# Altium PCB PCB_主板.pcbdoc
Units mil, origin at the board's own origin, x right, y up, seen from the top; angles counter-clockwise.
Board outline 5270 x 3720 mil, 2 copper layers (Top Layer, Bottom Layer); 67 components, 63 nets, 218 pads, 341 vias.
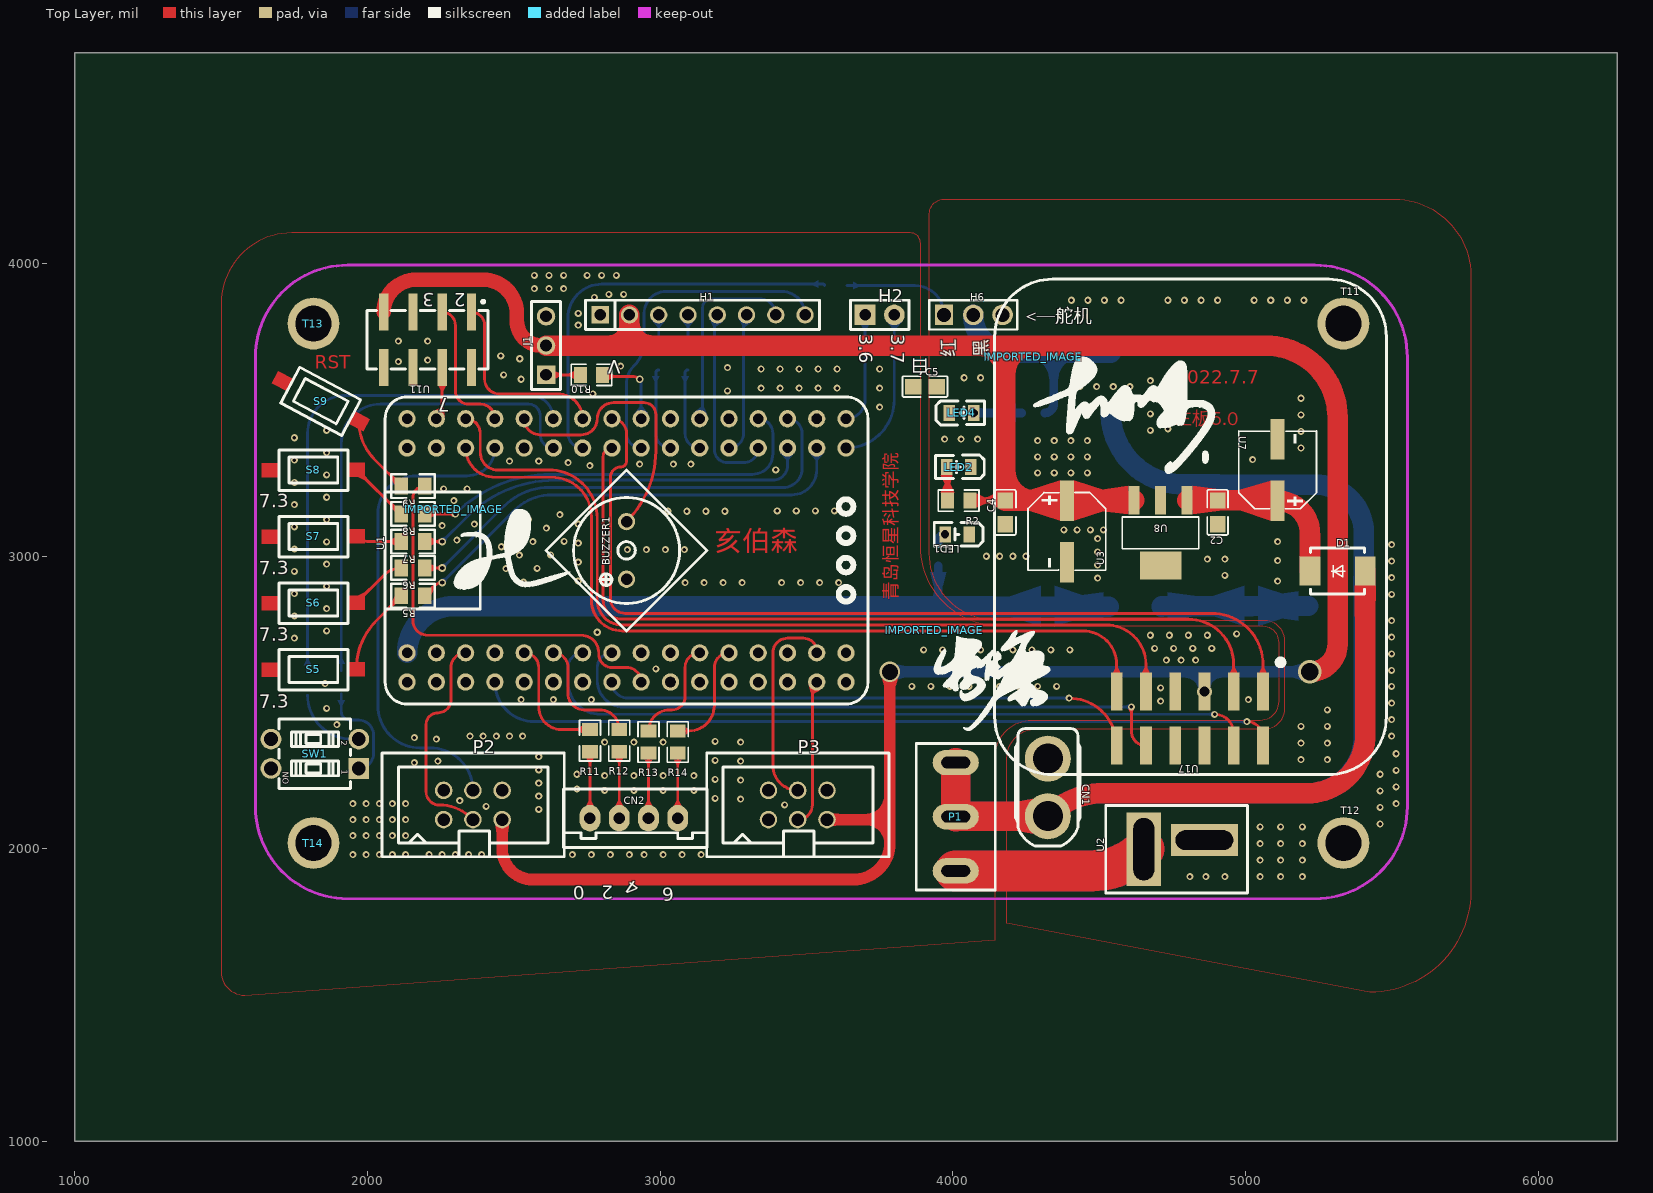
[diagram p0: Top Layer view]
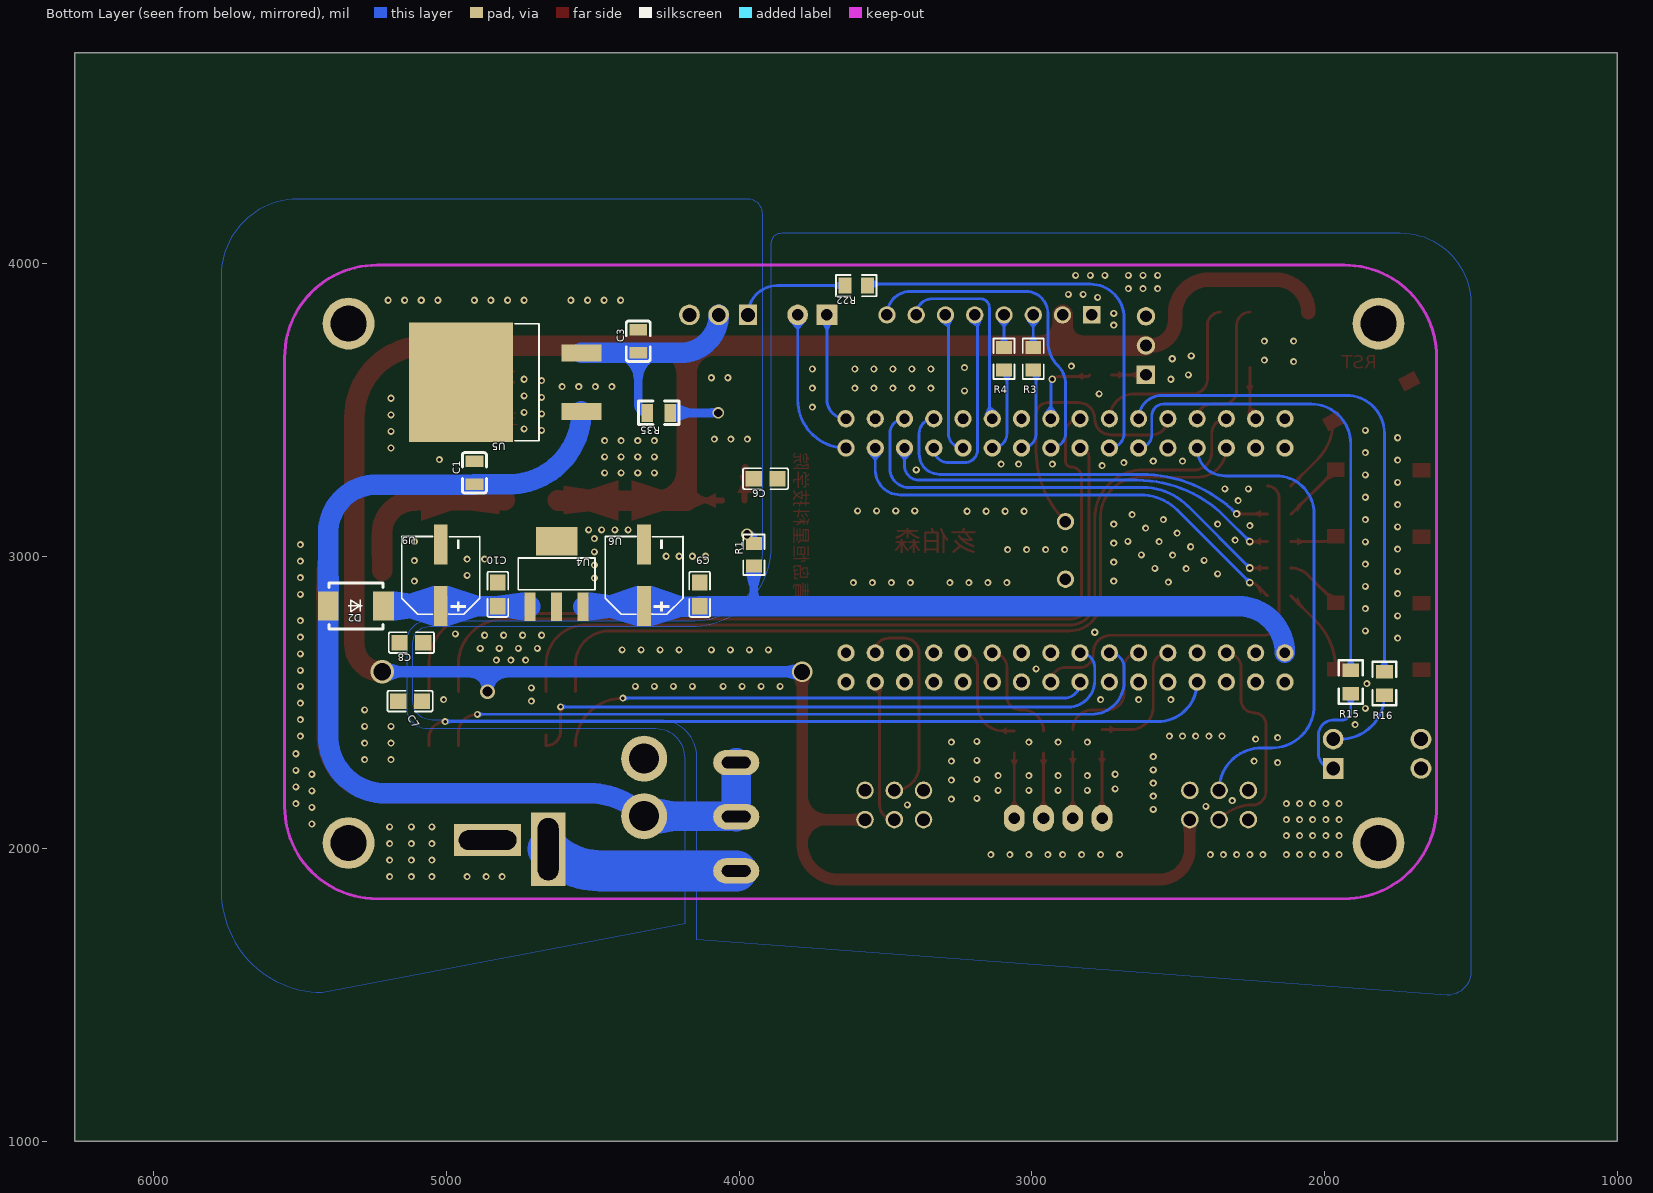
[diagram p1: Bottom Layer view, seen from below]

## Layer stack, top to bottom
Top Layer: signal copper (thickness not stored)
Dielectric: dielectric 12.6, FR-4, Dk 4.8
Bottom Layer: signal copper (thickness not stored)

## Board outline
6270,1000 1000,1000 1000,4720 6270,4720

## Components (designator, comment, footprint, x,y, rotation, side; value= is the part's Value field where it differs from the comment)
BUZZER1 "有源蜂鸣器直径9*5.5MM3V" BUZ-TH_BD9.0-P5.00-D0.6-L-FD 2885,3020 r90 top
C1 "330nF" C0805#1 4905,3285 r270 bottom
C2 "100uF" C0805#2 4905,3150 r90 top
C3 "100nF" C0805#1 4345,3735 r270 bottom
C4 "100uF" C0805#2 4180,3150 r90 top
C5 "0R" C0805#2 3905,3580 r0 top
C6 "0R" C0805#3 3910,3265 r180 bottom
C7 "0R" C0805#3 5125,2505 r180 bottom
C8 "0R" C0805#3 5120,2705 r180 bottom
C9 "100uF" C0805#3 4135,2870 r90 bottom
C10 "100uF" C0805#3 4825,2870 r90 bottom
CN1 "Changzhou" CONN-TH_XT30UPB-F 4325,2210 r270 top
CN2 "XH2.54-4A" XH2.54-4A 2910,2105 r0 top
D1 "SS54" SMB_L4.6-W3.6-LS5.3-R-RD#1 5315,2950 r0 top
D2 "SS54" SMB_L4.6-W3.6-LS5.3-R-RD#2 5310,2830 r180 bottom
H1 "排针1*8P 2.54" HDR-TH_8P-P2.54-V-M 3145,3825 r0 top
H2 "Header-Male-2.54_1x2" HDR-TH_2P-P2.54-V-M-1 3750,3825 r0 top
H6 "Z-211-0311-0021-001" HDR-TH_3P-P2.54-V-M-1 4070,3825 r0 top
IMPORTED_IMAGE "IMPORTED_IMAGE" IMPORTED_IMAGE 4274.6,3681.34 r0 top
IMPORTED_IMAGE "IMPORTED_IMAGE" IMPORTED_IMAGE 3936.54,2747.07 r0 top
IMPORTED_IMAGE "IMPORTED_IMAGE" IMPORTED_IMAGE 2294.77,3161.16 r0 top
J1 "排针 3P" "排针 3P" 2605,3720 r90 top
LED1 "E6C0805UR" LED0805-R-RD 4015,3075 r180 top
LED2 "E6C0805UR" LED0805-R-RD 4020,3305 r180 top
LED4 "E6C0805UR" LED0805-R-RD 4030,3490 r0 top
P1 "钮子开关" "钮子开关 MTS-102" 4010,2110 r90 top
P2 "HDR-IDC-2.54-2X3P" IDC-TH_6P-P2.54_C11214 2360,2150 r0 top
P3 "HDR-IDC-2.54-2X3P" IDC-TH_6P-P2.54_C11214 3470,2150 r0 top
R1 "4.7k" R0805#1 3950,3005 r270 bottom
R2 "4.7k" R0805#2 4020,3190 r180 top
R3 "100" 100R0805#1 2995,3675 r270 bottom
R4 "100" 100R0805#1 3095,3675 r270 bottom
R5 "470Ω" 0805#1 2195,2865 r180 top
R6 "470Ω" 0805#1 2195,2960 r180 top
R7 "470Ω" 0805#1 2195,3050 r180 top
R8 "470Ω" 0805#1 2195,3145 r180 top
R9 "470Ω" 0805#1 2195,3240 r180 top
R10 "100R" R0805#2 2765,3620 r180 top
R11 "100" 100R0805#2 2760,2370 r270 top
R12 "100" 100R0805#2 2860,2370 r270 top
R13 "100" 100R0805#2 2960,2365 r270 top
R14 "100" 100R0805#2 3060,2365 r270 top
R15 "470Ω" 0805#2 1910,2610 r90 bottom
R16 "470Ω" 0805#2 1795,2605 r90 bottom
R22 "1k" R0805#1 3600,3925 r180 bottom
R35 "330" R0805#3 4275,3490 r180 bottom
S5 "SW-PB" 3*6*2.5MM轻触开关 1815,2613.11 r180 top
S6 "SW-PB" 3*6*2.5MM轻触开关 1815,2840.41 r180 top
S7 "SW-PB" 3*6*2.5MM轻触开关 1815,3067.7 r180 top
S8 "SW-PB" 3*6*2.5MM轻触开关 1815,3295 r180 top
S9 "SW-PB" 3*6*2.5MM轻触开关 1840,3530 r152 top
SW1 "拨码开关2P-2.54" SW-TH_NDI-02H-V 1820,2325 r90 top
T11 "铜柱KBLADE" 螺丝孔-3MM 5335,3795 r0 top
T12 "铜柱KBLADE" 螺丝孔-3MM 5335,2020 r0 top
T13 "铜柱KBLADE" 螺丝孔-3MM 1815.01,3795 r0 top
T14 "铜柱KBLADE" 螺丝孔-3MM 1815,2020 r0 top
U1 "STC16H40K128_CoreBoard" STC16H40K128_COREBOARD 2885,3020 r90 top
U2 "T插" T插 4785,2030 r90 top
U3 "LM2940IMP-5.0" SOT-223-4_L6.5-W3.5-P2.30-LS7.0-BR#1 4710,3080 r90 top
U4 "LM2940IMP-5.0" SOT-223-4_L6.5-W3.5-P2.30-LS7.0-BR#2 4624.16,2939.69 r90 bottom
U5 "L7806" TO-263-2_L10.1-W9.1-P5.08-LS15.2-TL 4745,3595 r180 bottom
U6 "220uf16V" CAP-SMD_BD6.3-L6.6-W6.6-LS7.6-FD#1 4325,2935 r270 bottom
U7 "100uf25V" CAP-SMD_BD6.3-L6.6-W6.6-LS7.6-FD#2 5110,3295 r90 top
U8 "220uf16V" CAP-SMD_BD6.3-L6.6-W6.6-LS7.6-FD#2 4390,3085 r270 top
U9 "100uf25V" CAP-SMD_BD6.3-L6.6-W6.6-LS7.6-FD#1 5020,2935 r270 bottom
U11 "贴片排母_2X04_P2.54" HDR-SMD_8P-P2.54-V-F-R2-C4-S7.1 2205,3740 r180 top
U17 "贴片排针2*6P" 贴片排母2*6P 4810,2445 r180 top

## Footprints (in the part's own frame and the unit in brackets; to place one, negate y for a bottom-side part, rotate by r counter-clockwise, add the part's x,y. Pads: shape width x height; smd on the part's side, far side on the other; paste and mask are expansions set on the pad)
3*6*2.5MM轻触开关 [mil]
  Top Layer region: 116.91,-22.78 116.91,24.47 175.96,24.47 175.96,-22.78
  Top Layer region: -175.96,-24.47 -175.96,22.78 -116.91,22.78 -116.91,-24.47
  silkscreen extent -118,-68 118,70
100R0805#1 [mil]
  rect 44.59x54.21 smd paste-3937.01 mask+2: 1(38.04,0) 2(-38.04,0)
  silkscreen extent -69,-36 69,36
100R0805#2 [mil]
  rect 44.59x54.21 smd paste-3937.01 mask+2: 1(-38.04,0) 2(38.04,0)
  silkscreen extent -69,-36 69,36
0805#1 [mm]
  rect 1.16x1.47 smd paste+0 mask+0.051: 1(0,0) 2(2.032,0)
  silkscreen extent -0.88,-1.04 2.89,1.04
0805#2 [mm]
  rect 1.16x1.47 smd paste+0 mask+0.051: 1(0,0) 2(-2.032,0)
  silkscreen extent -2.89,-1.04 0.88,1.04
BUZ-TH_BD9.0-P5.00-D0.6-L-FD [mm]
  round 1.5 hole 1 paste+0 mask+0.051: 1(-2.5,0) 2(2.5,0)
  silkscreen extent -4.6,-4.6 4.6,4.6
C0805#1 [mm]
  rect 1x1.55 smd paste+0 mask+0.102: 1(1,0) 2(-1,0)
  silkscreen extent -1.75,-1.04 1.75,1.04
C0805#2 [mm]
  rect 1.41x1.35 smd paste-100 mask+0.051: 1(-1.03,0) 2(1.03,0)
  silkscreen extent -1.96,-0.9 1.96,0.9
C0805#3 [mm]
  rect 1.41x1.35 smd paste-100 mask+0.051: 1(1.03,0) 2(-1.03,0)
  silkscreen extent -1.96,-0.9 1.96,0.9
CAP-SMD_BD6.3-L6.6-W6.6-LS7.6-FD#1 [mm]
  rect 3.5x1.2 smd paste+0 mask+0.051: 1(2.67,0) 2(-2.67,0)
  silkscreen extent -3.38,-3.38 3.38,3.38
CAP-SMD_BD6.3-L6.6-W6.6-LS7.6-FD#2 [mm]
  rect 3.5x1.2 smd paste+0 mask+0.051: 1(-2.67,0) 2(2.67,0)
  silkscreen extent -3.38,-3.38 3.38,3.38
CONN-TH_XT30UPB-F [mm]
  round 4 hole 2.6 paste+0 mask+0.051: 1(-2.5,0) 2(2.5,0)
  silkscreen extent -5.1,-2.8 5.1,2.8
HDR-SMD_8P-P2.54-V-F-R2-C4-S7.1 [mm]
  rect 0.8x3.2 smd paste+0 mask+0.051: 1(-3.81,-2.4) 2(-3.81,2.4) 3(-1.27,-2.4) 4(-1.27,2.4) 5(1.27,-2.4) 6(1.27,2.4) 7(3.81,-2.4) 8(3.81,2.4)
  silkscreen extent -5.25,-3.43 5.25,2.54
HDR-TH_2P-P2.54-V-M-1 [mm]
  rect 1.8x1.8 hole 1 paste+0 mask+0.051: 1(-1.27,0)
  round 1.8 hole 1 paste+0 mask+0.051: 2(1.27,0)
  silkscreen extent -2.54,-1.27 2.54,1.27
HDR-TH_3P-P2.54-V-M-1 [mm]
  rect 1.575x1.8 hole 1.2 paste+0 mask+0.051: 1(-2.54,0)
  round 1.8 hole 1.2 paste+0 mask+0.051: 2(0,0) 3(2.54,0)
  silkscreen extent -3.81,-1.27 3.81,1.27
HDR-TH_8P-P2.54-V-M [mm]
  rect 1.5x1.5 hole 1 paste+0 mask+0.051: 1(-8.89,0)
  round 1.5 hole 1 paste+0 mask+0.051: 2(-6.35,0) 3(-3.81,0) 4(-1.27,0) 5(1.27,0) 6(3.81,0) 7(6.35,0) 8(8.89,0)
  silkscreen extent -10.16,-1.27 10.16,1.27
IDC-TH_6P-P2.54_C11214 [mil]
  round 60 hole 43.3 paste+0 mask+2: 1(-100,-50) 2(-100,50) 3(0,-50) 4(0,50) 5(100,-50) 6(100,50)
  silkscreen extent -311,-177 312,178
IMPORTED_IMAGE [mil]
  silkscreen extent 0,-400 622,0
LED0805-R-RD [mm]
  rect 1x1.4 smd paste+0 mask+0.051: 1(1.05,0) 2(-1.05,0)
  silkscreen extent -2.22,-1.04 1.99,1.01
R0805#1 [mil]
  rect 44.59x54.21 smd paste-3937.01 mask+2: 1(38.04,0) 2(-38.04,0)
  silkscreen extent -69,-36 69,36
R0805#2 [mil]
  rect 44.59x54.21 smd paste-3937.01 mask+2: 1(-38.04,0) 2(38.04,0)
  silkscreen extent -69,-36 69,36
R0805#3 [mil]
  rect 39.37x61.02 smd paste+0 mask+4: 1(39.37,0) 2(-39.37,0)
  silkscreen extent -69,-40 69,40
SMB_L4.6-W3.6-LS5.3-R-RD#1 [mm]
  rect 1.8x2.54 smd paste+0 mask+0.051: 1(2.4,0) 2(-2.4,0)
  silkscreen extent -2.35,-2 2.35,2
SMB_L4.6-W3.6-LS5.3-R-RD#2 [mm]
  rect 1.8x2.54 smd paste+0 mask+0.051: 1(-2.4,0) 2(2.4,0)
  silkscreen extent -2.35,-2 2.35,2
SOT-223-4_L6.5-W3.5-P2.30-LS7.0-BR#1 [mm]
  rect 2.47x0.98 smd paste+0 mask+0.051: 1(2.835,-2.3) 2(2.835,0) 3(2.835,2.3)
  rect 2.47x3.6 smd paste+0 mask+0.051: 4(-2.835,0)
  silkscreen extent -1.37,-3.33 1.37,3.33
SOT-223-4_L6.5-W3.5-P2.30-LS7.0-BR#2 [mm]
  rect 2.47x0.98 smd paste+0 mask+0.051: 1(-2.835,2.3) 2(-2.835,0) 3(-2.835,-2.3)
  rect 2.47x3.6 smd paste+0 mask+0.051: 4(2.835,0)
  silkscreen extent -1.37,-3.33 1.37,3.33
STC16H40K128_COREBOARD [mm]
  round 1.5 hole 0.9 paste+0 mask+0.051: 1(-11.43,19.05) 2(-8.89,19.05) 3(-11.43,16.51) 4(-8.89,16.51) 5(-11.43,13.97) 6(-8.89,13.97) 7(-11.43,11.43) 8(-8.89,11.43) 9(-11.43,8.89) 10(-8.89,8.89) 11(-11.43,6.35) 12(-8.89,6.35) 13(-11.43,3.81) 14(-8.89,3.81) 15(-11.43,1.27) 16(-8.89,1.27) 17(-11.43,-1.27) 18(-8.89,-1.27) 20(-8.89,-3.81) 21(-11.43,-6.35) 22(-8.89,-6.35) 23(-11.43,-8.89) 24(-8.89,-8.89) 25(-11.43,-11.43) 26(-8.89,-11.43) 27(-11.43,-13.97) 28(-8.89,-13.97) 29(-11.43,-16.51) 30(-8.89,-16.51) 31(-11.43,-19.05) 32(-8.89,-19.05) 35(8.89,-16.51) 37(8.89,-13.97) 38(11.43,-13.97) 39(8.89,-11.43) 40(11.43,-11.43) 41(8.89,-8.89) 43(8.89,-6.35) 44(11.43,-6.35) 45(8.89,-3.81) 46(11.43,-3.81) 47(8.89,-1.27) 48(11.43,-1.27) 49(8.89,1.27) 50(11.43,1.27) 51(8.89,3.81) 52(11.43,3.81) 53(8.89,6.35) 54(11.43,6.35) 56(11.43,8.89) 57(8.89,11.43) 58(11.43,11.43) 59(8.89,13.97) 60(11.43,13.97) 61(8.89,16.51) 62(11.43,16.51) 63(8.89,19.05) 64(11.43,19.05)
  round 1.5 hole 0.9 slot 0.905 at 0 deg paste+0 mask+0.051: 19(-11.43,-3.81) 33(8.89,-19.05) 34(11.43,-19.05) 36(11.43,-16.51) 42(11.43,-8.89) 55(8.89,8.89)
  silkscreen extent -13.33,-20.95 13.33,20.95
SW-TH_NDI-02H-V [mm]
  rect 1.8x1.8 hole 1.2 paste+0 mask+0.051: 1(-1.27,-3.81)
  round 1.8 hole 1.2 paste+0 mask+0.051: 2(1.27,-3.81) 3(1.27,3.81) 4(-1.27,3.81)
  silkscreen extent -3.01,-3.1 3.01,3.1
TO-263-2_L10.1-W9.1-P5.08-LS15.2-TL [mm]
  rect 3.5x1.5 smd paste+0 mask+0.051: 1(5.228,-2.54) 3(5.228,2.54)
  rect 9x10.4 smd paste+0 mask+0.051: 2(-5.228,0)
  silkscreen extent -0.55,-5.08 1.54,5.08
T插 [mm]
  rect 6.4x3 hole 1.8 slot 5.402 at 0 deg paste+0 mask+0.102: 1(-0.789,3.359)
  rect 2.8x5.8 hole 1.7 slot 4.999 at 90 deg paste+0 mask+0.102: 2(0.001,-1.905)
  silkscreen extent -4.6,-5.64 3.02,6.66
XH2.54-4A [mm]
  oval 1.8x2.3 hole 1 paste+0 mask+0.102: 1(3.81,0) 2(1.27,0) 3(-1.27,0) 4(-3.81,0)
  silkscreen extent -6.1,-2.54 6.35,2.54
"排针 3P" [mm]
  rect 1.6x1.6 hole 1.02 paste+0 mask+0.102: 1(-2.54,-0.127)
  round 1.6 hole 1.02 paste+0 mask+0.102: 2(0,-0.127) 3(2.54,-0.127)
  silkscreen extent -3.81,-1.4 3.81,1.14
螺丝孔-3MM [mil]
  round 177.16 hole 122.04 paste+0 mask+2: 1(0,0)
贴片排母2*6P [mm]
  rect 1.02x3.3 smd paste+0 mask+0.051: 1(-6.35,-2.35) 2(-3.81,-2.35) 3(-1.27,-2.35) 4(1.27,-2.35) 5(3.81,-2.35)
  rect 1.02x3.3 smd paste+0 mask+0.102: 6(6.35,-2.35) 7(6.35,2.35) 8(3.81,2.35) 9(1.27,2.35) 10(-1.27,2.35) 11(-3.81,2.35) 12(-6.35,2.35)
  silkscreen extent -8.13,-5.14 -7.62,-4.64
"钮子开关 MTS-102" [mm]
  oval 2.2x4 hole 1 slot 2.5 at 90 deg paste+0 mask+0.102: 1(-4.7,0) 2(0,0) 3(4.7,0)
  silkscreen extent -6.35,-3.43 6.35,3.43

## Via types
v1: diameter 24.1, hole 12, Top Layer to Bottom Layer, tented both sides, 326 vias
v2: diameter 26, hole 14, Top Layer to Bottom Layer, tented both sides, 5 vias
v3: diameter 24, hole 12, Top Layer to Bottom Layer, tented both sides, 4 vias
v4: diameter 40, hole 28, Top Layer to Bottom Layer, tented both sides, 2 vias
v5: diameter 26, hole 12, Top Layer to Bottom Layer, tented both sides, 1 vias
v6: diameter 70, hole 55, Top Layer to Bottom Layer, tented both sides, 1 vias
v7: diameter 80, hole 60, Top Layer to Bottom Layer, tented both sides, 1 vias
v8: diameter 50, hole 35, Top Layer to Bottom Layer, tented both sides, 1 vias

## Nets (pads, with @x,y where several pads share a name; then routed paths per layer and width w, separated by ;. In a path a pad name is that pad's centre, name@x,y a point inside that pad or via, vN(x,y) a via of type N, cw(c..) or ccw(c..) an arc to the next point about the centre after c; other vN are vias at no path point)
0.0: U1.50 U17.1 | length 3125.9
  Top Layer w10: U1.50 cw(c2835,3420) 2885,3420 2885,3385 2885,3325 cw(c2865,3325) 2865,3305 ccw(c2865,3270) 2830,3270 2830,2855 ccw(c2880,2855) 2880,2805 4735,2805 4885,2805 cw(c4885,2630) 5060,2630 U17.1
0.1: U1.49 U17.2 | length 2910.2
  Top Layer w10: U1.49 ccw(c2835,3340) 2805,3340 2805,2850 ccw(c2870,2850) 2870,2785 4470,2785 4805,2785 cw(c4805,2630) 4960,2630 U17.2
0.2: U1.52 U11.1 | length 667.2
  Top Layer w10: U11.1 cw(c2355,3789.48) 2400,3789.48 2400,3605 ccw(c2450,3605) 2450,3555 2575,3555 2650,3555 cw(c2650,3470) U1.52
0.3: U1.58 U11.3 | length 484.4
  Top Layer w10: U11.3 cw(c2255,3789.48) 2300,3789.48 2300,3590 2300,3565 ccw(c2345,3565) 2345,3520 2385,3520 cw(c2385,3470) U1.58
0.4: P2.4 U1.57 | length 1674
  Bottom Layer w10: P2.4 ccw(c2215,2200) 2215,2345 2180,2345 cw(c2180,2490) 2035,2490 2035,2730 2035,3145 cw(c2165,3145) 2165,3275 2340,3275 ccw(c2340,3370) U1.57
0.5: U1.60 U17.5 | length 3045
  Top Layer w10: U1.60 cw(c2335,3420) 2385,3420 2385,3365 2385,3355 ccw(c2445,3355) 2445,3295 2620,3295 cw(c2620,3130) 2785,3130 2785,2850 ccw(c2870,2850) 2870,2765 4525,2765 cw(c4525,2630) 4660,2630 U17.5
0.6: U1.59 U17.6 | length 2862.2
  Top Layer w10: U1.59 ccw(c2435,3370) 2435,3270 2630,3270 cw(c2630,3135) 2765,3135 2765,2850 ccw(c2870,2850) 2870,2745 2990,2745 4445,2745 cw(c4445,2630) 4560,2630 U17.6
0.7: U1.62 U11.4 | length 186.9
  Top Layer w10: U1.62 ccw(c2235,3490) 2255,3490 U11.4
1.3: U1.7 U17.12 | length 2771
  Top Layer w10: v3(5005,2435) cw(c5005,2380) U17.12@5060,2380 ; U17.12 U17.12@5060,2390
  Bottom Layer w10: U1.7 ccw(c2570,2570) 2570,2435 4845,2435 v3(5005,2435)
1.4: U1.14 U17.11 | length 2545.9
  Top Layer w10: v3(4895,2460) cw(c4895,2395) 4960,2395 U17.11
  Bottom Layer w10: U1.14 ccw(c2735,2620) 2685,2620 2685,2570 ccw(c2795,2570) 2795,2460 4515,2460 v3(4895,2460)
1.5: U1.16 U17.8 | length 2231
  Top Layer w10: v3(4610,2485) 4610,2402.48 ccw(c4660,2402.48) U17.8 ; U17.8@4660,2385 U17.8 ; U17.8@4660,2390 U17.8
  Bottom Layer w10: U1.16 ccw(c2835,2620) 2785,2620 2785,2575 ccw(c2875,2575) 2875,2485 3290,2485 4565,2485 v3(4610,2485)
1.6: U1.15 U17.7 | length 1849.2
  Top Layer w10: v3(4397.48,2515) cw(c4397.48,2352.48) U17.7
  Bottom Layer w10: U1.15 ccw(c2890,2570) 2890,2515 4300,2515 v3(4397.48,2515)
2.0: H1.5 U1.39 | length 669.9
  Bottom Layer w10: H1.5 ccw(c3195,3815) 3185,3815 3185,3425 3185,3365 ccw(c3230,3365) 3230,3320 3285,3320 ccw(c3285,3370) U1.39
2.1: H1.6 U1.41 | length 489.2
  Bottom Layer w10: U1.41 ccw(c3235,3420) 3285,3420 3285,3425 3285,3815 cw(c3295,3815) H1.6
2.2: H1.7 U1.44 | length 684.2
  Bottom Layer w10: U1.44 ccw(c3135,3480) 3145,3480 3145,3800 3145,3850 cw(c3175,3850) 3175,3880 3340,3880 cw(c3340,3825) H1.7
2.3: R4.1 U1.43 | length 301.2
  Bottom Layer w10: R4.1@3085,3626.96 cw(c3095,3626.96) R4.1 ; R4.1@3085,3627 3085,3425 3085,3420 ccw(c3135,3420) U1.43
2.5: R3.1 U1.45 | length 301.2
  Bottom Layer w10: R3.1@2985,3626.96 cw(c2995,3626.96) R3.1 ; R3.1@2985,3627 2985,3425 2985,3420 ccw(c3035,3420) U1.45
2.6: R10.1 U1.48 | length 268.9
  Top Layer w10: R10.1 ccw(c2808.04,3620) R10.1@2808.04,3615 ; R10.1@2808,3615 2865,3615 2905.86,3615 cw(c2905.86,3580.86) v2(2930,3605)
  Bottom Layer w10: v2(2930,3605) cw(c2917.93,3592.93) 2935,3592.93 2935,3525 U1.48
2.7: H1.8 U1.47 | length 1143.1
  Bottom Layer w10: U1.47 cw(c2935,3420) 2885,3420 2885,3425 2885,3505 2885,3589.64 cw(c2970.36,3589.64) 2910,3650 ccw(c2825.5,3734.5) 2945,3734.5 2945,3830 cw(c3020,3830) 3020,3905 3105,3905 3415,3905 cw(c3415,3825) H1.8
3.4: P3.4 U1.30 | length 727.7
  Top Layer w10: P3.4 cw(c3470,2285) 3385,2285 3385,2670 cw(c3435,2670) 3435,2720 3490,2720 cw(c3490,2675) 3535,2675 U1.30
3.5: P3.3 U1.29 | length 507.1
  Top Layer w10: P3.3 ccw(c3470,2150) 3520,2150 3520,2205 3520,2555 cw(c3535,2555) U1.29
3.6: H2.1 U1.34 | length 392.1
  Bottom Layer w10: U1.34 ccw(c3635,3535) 3700,3535 H2.1
3.7: H2.2 U1.33 | length 549.2
  Bottom Layer w10: U1.33 ccw(c3635,3535) 3800,3535 H2.2
5.3: P2.3 U1.6 | length 757.2
  Top Layer w10: 2285,2525 2285,2620 cw(c2335,2620) U1.6 ; 2285,2530.53 2285,2510 cw(c2240,2510) 2240,2465 ccw(c2240,2425) 2200,2425 2200,2330 2200,2195 ccw(c2245,2195) 2245,2150 cw(c2245,1993.08) 2355.96,2104.04 P2.3
6.0: R11.1 U1.10 | length 432.4
  Top Layer w10: U1.10 cw(c2535,2620) 2585,2620 2585,2485 ccw(c2661.96,2485) 2661.96,2408.04 ; 2662,2408 R11.1
6.2: R12.1 U1.12 | length 413.2
  Top Layer w10: U1.12 cw(c2635,2620) 2685,2620 2685,2530 ccw(c2740,2530) 2740,2475 2785,2475 2793.04,2475 cw(c2793.04,2408.04) R12.1
6.4: R13.1 U1.22 | length 370.3
  Top Layer w10: R13.1 cw(c3031.96,2403.04) 3031.96,2475 3040,2475 ccw(c3040,2520) 3085,2520 3085,2570 3085,2620 cw(c3135,2620) U1.22
6.6: R14.1 U1.24 | length 383.1
  Top Layer w10: R14.1 3098,2403 ; 3098.04,2403.04 ccw(c3098.04,2490) 3185,2490 3185,2620 cw(c3235,2620) U1.24
7.0: R5.1 U1.35 | length 1597.1
  Top Layer w10: R5.1 2229.4,2899.4 cw(c2255,2873.79) v2(2255,2910)
  Bottom Layer w10: v2(2255,2910) 2501.97,3156.97 cw(c2630,3028.93) 2630,3210 3450,3210 ccw(c3450,3295) 3535,3295 U1.35
7.1: R6.1 U1.38 | length 1630.2
  Top Layer w10: R6.1 v2(2255,2960)
  Bottom Layer w10: v2(2255,2960) 2466.36,3171.36 cw(c2620,3017.72) 2620,3235 3420,3235 ccw(c3420,3300) 3485,3300 3485,3420 ccw(c3435,3420) U1.38
7.2: R7.1 U1.37 | length 1397.3
  Top Layer w10: R7.1 v2(2255,3050)
  Bottom Layer w10: v2(2255,3050) 2341.26,3136.26 cw(c2640,2837.51) 2640,3260 3385,3260 ccw(c3385,3310) 3435,3310 U1.37
7.3: R8.1 U1.40 | length 1414.6
  Top Layer w10: R8.1 v2(2300,3145)
  Bottom Layer w10: v2(2300,3145) cw(c2625.92,2819.08) 2625.92,3280 3245,3280 3315,3280 ccw(c3315,3350) 3385,3350 3385,3420 ccw(c3335,3420) U1.40
7.4: R22.1 U1.51 | length 1419
  Bottom Layer w10: U1.51 cw(c2735,3420) 2685,3420 2685,3520 2685,3815 cw(c2800,3815) 2800,3930 R22.1@3557,3930 ; R22.1@3556.96,3930 cw(c3556.96,3925) R22.1
7.5: R16.1 U1.54 | length 1774.9
  Bottom Layer w10: R16.1 1795,3420 cw(c1925,3420) 1925,3550 2555,3550 cw(c2555,3470) U1.54
7.6: R15.1 U1.53 | length 1690.6
  Bottom Layer w10: R15.1 1910,3385 cw(c2045,3385) 2045,3520 2550,3520 cw(c2550,3480) 2590,3480 2590,3415 ccw(c2635,3415) U1.53
7.7: BUZZER1.2 U1.56 | length 960.3
  Top Layer w10: U1.56 ccw(c2590,3470) 2590,3415 2710,3415 2730,3415 ccw(c2730,3470) 2785,3470 cw(c2840,3470) 2840,3525 2945,3525 cw(c2945,3485) 2985,3485 2985,3375 2985,3359.85 cw(c2643.58,3359.85) BUZZER1.2
CN2_1: CN2.1 R14.2 | length 222
  Top Layer w10: CN2.1 R14.2
CN2_2: CN2.2 R13.2 | length 222
  Top Layer w10: CN2.2 R13.2
CN2_3: CN2.3 R12.2 | length 227
  Top Layer w10: CN2.3 R12.2
CN2_4: CN2.4 R11.2 | length 227
  Top Layer w10: CN2.4 R11.2
GND5: BUZZER1.1 C5.1 C6.1 C7.1 C8.1 H1.1 J1.3 P2.6 P3.6 SW1.3 SW1.4 U1.1 U1.3 U11.5 U11.6 U17.4
  other v1: 1950,1980 1995,1980 2040,1980 2085,1980 2130,1980 2210,1980 2255,1980 2300,1980 2345,1980 2390,1980 2700,1980 2765,1980 2830,1980 2895,1980 2945,1980 3010,1980 3075,1980 3140,1980 1950,2045 1995,2045 2040,2045 2085,2045 2130,2045 1950,2100 1995,2100 2040,2100 2085,2100 2130,2100 2585,2135 2405,2145 3425,2150 1950,2155 1995,2155 2040,2155 2085,2155 2130,2155 2315,2165 3275,2170 3187.5,2172.5 2585,2180 2810,2200 2910,2200 3010,2200 3115,2200 2715,2205 2585,2225 3275,2235 3187.5,2237.5 2810,2250 2910,2250 3010,2250 3115,2250 2715,2255 2585,2270 2160,2295 2240,2300 3275,2300 3187.5,2302.5 2585,2315 2810,2365 2910,2365 3010,2365 3275,2365 3187.5,2367.5 2235,2375 2160,2380 2350,2385 2395,2385 2440,2385 2485,2385 2530,2385 1895,2425 1860,2480 4710,2505 2525,2510 2635,2510 2765,2510 5010,2510 4710,2550 3860,2555 3925,2555 3990,2555 4055,2555 4160,2555 4225,2555 4290,2555 4355,2555 1855,2565 2985,2615 4730,2645 4780,2645 4830,2645 3900,2680 3965,2680 4030,2680 4095,2680 4205,2680 4270,2680 4335,2680 4400,2680 4690,2685 4755,2685 4820,2685 4885,2685 1750,2720 4675,2730 4740,2730 4805,2730 4870,2730 4970,2735 1860,2745 1750,2796.11 1860,2821.11 1750,2872.22 1860,2897.22 3085,2910 3150,2910 3215,2910 3280,2910 3415,2910 3480,2910 3545,2910 3610,2910 2533,2912 2720,2915 2365,2940 1750,2948.33 2472.5,2957.5 2579.25,2958.25 1860,2973.33 2720,2980 2411.25,2986.25 2518.75,3003.75 2625.5,3004.5 2887.5,3022.5 2952.5,3022.5 3017.5,3022.5 3082.5,3022.5 1750,3024.44 2457.5,3032.5 2720,3045 1860,3049.44 2565,3050 2671.75,3050.75 2305,3055 2503.75,3078.75 2611.25,3096.25 1750,3100.56 2255,3105 2365,3110 2720,3110 2550,3125 1860,3125.56 2657.5,3142.5 3026.15,3153.85 3091.15,3153.85 3156.15,3153.85 3221.15,3153.85 3400,3155 3465,3155 3530,3155 3595,3155 1750,3176.67 2295,3190 1860,3201.67 2260,3230 2340,3230 1750,3252.78 1860,3277.78 3395,3295 2760,3310 2930,3315 3045,3315 3105,3315 2685,3320 2485,3325 2585,3325 1750,3328.89 1860,3353.89 1750,3405 1860,3430 3750,3510 2770,3555 3230,3565 3345,3575 3410,3575 3475,3575 3540,3575 3605,3575 3750,3575 2525,3605 2465,3620 3345,3640 3410,3640 3475,3640 3540,3640 3605,3640 3750,3640 3230,3645 2865,3650 2105,3665 2205,3670 2520,3675 2455,3685 2105,3735 2205,3735 2720,3790 2720,3830 2775,3885 2825,3895 2875,3895 2570,3915 2620,3915 2670,3915 2570,3960 2620,3960 2670,3960 2750,3960 2800,3960 2850,3960
  other v5: 2785,2740
GNDBAT: C1.2 C2.1 C3.2 C4.1 C5.2 C6.2 C7.2 C8.2 C9.1 C10.1 CN1.1 H6.3 LED1.2 LED2.2 LED4.2 U2.2 U3.2 U3.4 U4.2 U4.4 U5.2 U6.2 U7.2 U8.2 U9.2
  other v1: 4810,1905 4865,1905 4930,1905 5050,1905 5120,1905 5195,1905 5050,1961.67 5120,1961.67 5195,1961.67 5050,2018.33 5120,2018.33 5195,2018.33 5050,2075 5120,2075 5195,2075 5460,2085 5460,2141.67 5515,2155 5460,2198.33 5515,2211.67 5460,2255 5515,2268.33 5190,2305 5280,2305 5515,2325 5190,2361.67 5280,2361.67 5500,2385 5190,2418.33 5280,2418.33 5500,2441.67 5280,2475 5500,2498.33 5500,2555 5500,2610 5500,2666.67 5500,2723.33 5500,2780 5500,2870 5110,2915 4495,2925 5500,2926.67 4930,2935 4495,2970 5500,2983.33 5110,2985 4870,2990 4930,2990 4115,3000 4160,3000 4205,3000 4250,3000 4495,3015 5500,3040 5110,3050 4495,3060 4380,3090 4425,3090 4470,3090 4515,3090 4290,3285 4346.67,3285 4403.33,3285 4460,3285 5025,3330 4290,3340 4346.67,3340 4403.33,3340 4460,3340 5190,3370 4290,3395 4346.67,3395 4403.33,3395 4460,3395 3971.67,3400 4028.33,3400 4085,3400 5190,3426.67 4675,3430 4735,3435 5190,3483.33 4675,3486.67 4735,3491.67 5190,3540 4675,3543.33 4735,3548.33 4435,3580 4491.67,3580 4548.33,3580 4605,3580 4675,3600 4735,3605 4038.33,3610 4095,3610 4405,3875 4461.67,3875 4518.33,3875 4575,3875 4735,3875 4791.67,3875 4848.33,3875 4905,3875 5030,3875 5086.67,3875 5143.33,3875 5200,3875
LED1_1: LED1.1 R1.2 | length 45.5
  Bottom Layer w30: R1.2 3950,3051.35 cw(c3973.65,3051.35) v4(3973.65,3075)
LED4_1: LED4.1 R35.1 | length 164.2
  Bottom Layer w30: v4(4071.35,3489.99) R35.1
R2_2: LED2.1 R2.2 | length 116.9
  Top Layer w20: LED2.1 cw(c3978.65,3301.69) LED2.1@3981.96,3301.69 ; R2.2 LED2.1@3982,3301.7
R3_2: H1.3 R3.2 | length 112
  Bottom Layer w10: R3.2 H1.3
R4_2: H1.4 R4.2 | length 112
  Bottom Layer w10: R4.2 H1.4
R10_2: J1.1 R10.2 | length 117
  Top Layer w10: J1.1 R10.2
R22_2: H6.1 R22.2 | length 389.1
  Bottom Layer w10: R22.2 3870,3925 cw(c3870,3825) H6.1
RST: R9.1 U1.17 | length 1384.8
  Top Layer w10: R9.1 ccw(c2195,3200) 2155,3200 2155,2915 2155,2780 ccw(c2205,2780) 2205,2730 2730,2730 cw(c2730,2670) 2790,2670 2790,2665 ccw(c2835,2665) 2835,2620 2885,2620 cw(c2885,2570) U1.17
S5_1: R5.2 | length 304.5
  Top Layer w10: 1961.44,2613.96 cw(c2196.78,2613.96) 2030.37,2780.37 ; 2030.4,2780.4 R5.2
S6_1: R6.2 | length 199.2
  Top Layer w10: 1961.4,2841.3 2055.6,2935.4 ; 2055.56,2935.38 cw(c2115,2875.94) R6.2
S7_1: R7.2 | length 158.5
  Top Layer w10: 1961.44,3068.55 ccw(c2006.22,3113.33) 2006.22,3050 R7.2
S8_1: R8.2 | length 215.8
  Top Layer w10: 1961.4,3295.8 R8.2@2110.4,3146.9 ; R8.2@2110.37,3146.92 ccw(c2115,3151.54) R8.2
S9_1: R9.2 | length 274.3
  Top Layer w10: 1969.7,3462 ccw(c2154.87,3462) 2023.94,3331.06 ; 2023.9,3331.1 R9.2
SW1_1: R15.2 SW1.1 | length 359.2
  Bottom Layer w10: R15.2 1910,2470 ccw(c1940,2470) 1940,2440 1970,2440 cw(c1970,2390) 2020,2390 2020,2325 cw(c1970,2325) SW1.1
SW1_2: R16.2 SW1.2 | length 260.6
  Bottom Layer w10: R16.2 ccw(c1944.99,2524.99) 1944.99,2375 SW1.2
U2_1: P1.1 U2.1 | length 1325
  Top Layer w140: P1.1 4474.1,1925 ; 4474.11,1924.96 ccw(c4474.11,2177.54) U2.1@4652.71,1998.94
  Bottom Layer w140: P1.1 4474.1,1925 ; 4474.11,1924.96 ccw(c4474.11,2177.54) U2.1@4652.71,1998.94
U3_1: C2.2 D1.2 U3.1 U7.1 | length 614.2
  Top Layer w70: U3.1 U7.1@5108.3,3191.6 ; U7.1@5108.27,3191.61 cw(c5108.27,3189.88) U7.1 cw(c5110,3079.37) 5220.51,3079.37 ; D1.2@5220.01,2950.5 ccw(c5220.51,2950.5) D1.2 5220.5,3079.4
U4_1: C10.2 D2.2 U4.1 U9.1 | length 501.9
  Bottom Layer w70: U4.1 cw(c4716.08,2828.07) U4.1@4716.08,2829.44 ; U4.1@4716.1,2829.4 C10.2 ; C10.2 cw(c4825.43,2829.44) C10.2@4825.43,2829.88 ; C10.2@4825.4,2829.9 U9.1 cw(c5020.12,2829.88) 5020.12,2830 D2.2
VCC5: C4.2 C9.2 H1.2 J1.2 P2.5 P3.5 R1.1 R2.1 U1.2 U3.3 U4.3 U6.1 U8.1 U11.7 U17.3 | length 13526.5
  Top Layer w20: C4.2@4179.45,3190 ccw(c4179.45,3190.55) C4.2 ; C4.2@4179.5,3190 R2.1 4096.5,3190 ccw(c4096.51,3273.49) 4180,3273.49
  Top Layer w40: P2.5 2460,2000 ccw(c2565,2000) 2565,1895 3660,1895 ccw(c3660,2020) 3785,2020 ; P3.5 3703.18,2100 ; 3785,2181.82 cw(c3703.18,2181.82) 3703.18,2100 ; v6(3785,2605) 3785,2350 3785,2020 ; 3703.18,2100 3705,2100 cw(c3705,2020) 3785,2020
  Top Layer w50: U11.7 cw(c2165.52,3834.48) 2165.52,3945 2395,3945 cw(c2395,3830) 2510,3830 2510,3805 ccw(c2595,3805) 2595,3720 J1.2
  Top Layer w70: J1.2 3445,3720 3555,3720 4085,3720 ; 2826.01,3720 ccw(c2826.01,3788.99) 2895,3788.99 H1.2 2895,3797.01 ccw(c2972.01,3797.01) 2972.01,3720 ; 4180,3312.06 4180,3291.27 ccw(c4280.72,3291.27) 4280.72,3190.55 ; 4275,3720 ccw(c4275,3625) 4180,3625 ; U3.3@4618.4,3190.5 4180,3190.5 4180,3485 4180,3625 ; U3.3@4618.38,3190.55 ccw(c4618.38,3191.61) U3.3 ; 4741.11,3720 5070,3720 cw(c5070,3475) 5315,3475 5315,2765 5315,2700 cw(c5220,2700) v7(5220,2605) ; 4840,3720 4085,3720 ; 4085,3720 cw(c4085,3625) 4180,3625
  Bottom Layer w20: 3998.96,2829.45 4035,2829.45
  Bottom Layer w30: 3901.04,2829.45 ccw(c3901.04,2878.4) 3950,2878.4 ; R1.1 3950,2878.4 ; 4018.19,2829.45 3998.96,2829.45 cw(c3998.96,2878.4) 3950,2878.4
  Bottom Layer w40: v6(3785,2605) v7(5220,2605) ; 4790,2605 4792.52,2605 cw(c4792.52,2537.52) v8(4860,2537.52) 4860,2544.86 cw(c4920.14,2544.86) 4920.14,2605
  Bottom Layer w70: U1.2 cw(c2294.45,2670) 2294.45,2829.45 ; 2294.4,2829.4 C9.2 ; C9.2 ccw(c4136.38,2829.45) C9.2@4136.38,2828.07 ; C9.2@4136.4,2828.1 U4.3
VCCBAT: C1.1 CN1.2 D1.1 D2.1 P1.2 P1.3 U5.1 | length 5791.5
  Top Layer w70: CN1.2 cw(c4514.32,1922.26) 4514.32,2190 5060,2190 5210,2190 ccw(c5210,2389.49) 5409.49,2389.49 5409.49,2539.49 D1.1
  Top Layer w100: P1.3 P1.2 cw(c4011.58,2110) 4011.58,2111.58 CN1.2
  Bottom Layer w70: CN1.2 cw(c4514.32,1922.26) 4514.32,2190 5055,2190 5210,2190 ccw(c5210,2385) 5405,2385 5405,2829.5 ccw(c5404.49,2829.49) D2.1 5404.5,3080.5 ccw(c5240,3080.51) 5240,3245 C1.1@4905.6,3245 ; U5.1 ccw(c4788.56,3495) 4788.56,3245.63 ; 4788.6,3245.6 C1.1 ; C1.1 ccw(c4905.63,3245.63) C1.1@4905.63,3245
  Bottom Layer w100: P1.3 P1.2 cw(c4011.58,2110) 4011.58,2111.58 CN1.2
VCCSTEER: C3.1 H6.2 R35.2 U5.3 | length 1069.5
  Bottom Layer w30: 4245,3695.63 4249.7,3695.63 cw(c4249.7,3600.34) 4345,3600.34 ; R35.2 ccw(c4314.37,3520.64) 4345,3520.64 ; 4345,3520.6 C3.1 ; 4345,3601.08 cw(c4438.92,3601.08) 4438.92,3695 4440,3695
  Bottom Layer w70: H6.2 ccw(c4199.37,3825) 4199.37,3695.63 ; 4199.4,3695.6 C3.1 ; C3.1 ccw(c4345.63,3695.63) C3.1@4345.63,3695 ; C3.1@4345.6,3695 U5.3
pads on no net: P2.1 P2.2 P3.1 P3.2 T11.1 T12.1 T13.1 T14.1 U1.4 U1.5 U1.8 U1.9 U1.11 U1.13 U1.18 U1.19 U1.20 U1.21 U1.23 U1.25 U1.26 U1.27 U1.28 U1.31 U1.32 U1.36 U1.42 U1.46 U1.55 U1.61 U1.63 U1.64 U11.2 U11.8 U17.9 U17.10

## Polygon pours and split planes (outlines as drawn)
GNDBAT on Top Layer (solid): 4185,1745 4185,2310 cw(c4285,2310) 4285,2410 5065,2410 ccw(c5065,2480) 5135,2480 5135,2710 ccw(c5065,2710) 5065,2780 4150,2780 cw(c4150,3010) 3920,3010 3920,4170 cw(c3970,4170) 3970,4220 5510,4220 cw(c5510,3960) 5770,3960 5770,1855 cw(c5425,1855) 5425,1510
GND5 on Top Layer (solid): 4145,1690 4145,2315 cw(c4270,2315) 4270,2440 5050,2440 ccw(c5050,2505) 5115,2505 5115,2705 ccw(c5060,2705) 5060,2760 4165,2760 cw(c4165,3035) 3890,3035 3890,4070 ccw(c3855,4070) 3855,4105 1740,4105 ccw(c1740,3865) 1500,3865 1500,1580 ccw(c1580,1580) 1580,1500
GNDBAT on Bottom Layer (solid): 4185,1745 4185,2310 cw(c4285,2310) 4285,2410 5065,2410 ccw(c5065,2480) 5135,2480 5135,2710 ccw(c5065,2710) 5065,2780 4150,2780 cw(c4150,3010) 3920,3010 3920,4170 cw(c3970,4170) 3970,4220 5510,4220 cw(c5510,3960) 5770,3960 5770,1855 cw(c5425,1855) 5425,1510
GND5 on Bottom Layer (solid): 4145,1690 4145,2315 cw(c4270,2315) 4270,2440 5050,2440 ccw(c5050,2505) 5115,2505 5115,2705 ccw(c5060,2705) 5060,2760 4165,2760 cw(c4165,3035) 3890,3035 3890,4070 ccw(c3855,4070) 3855,4105 1740,4105 ccw(c1740,3865) 1500,3865 1500,1580 ccw(c1580,1580) 1580,1500

## Keep-outs
Keep-Out Layer:
  lines w10: 1616.5,2144.61 ccw(c1931.46,2144.61) 1931.46,1829.65 ; 1616.5,3680.04 cw(c1931.46,3680.04) 1931.46,3995 ; 5238.54,1829.65 ccw(c5238.54,2144.61) 5553.5,2144.61 ; 5238.54,3995 cw(c5238.54,3680.04) 5553.5,3680.04

## Other copper
Top Layer:
  region net VCCBAT: 4045.43,2251.73 3974.57,2251.73 3960,2110 4060,2110
  region net VCCBAT: 3974.57,2153.31 4045.43,2153.31 4060,2295.04 3960,2295.04
  region net CN2_4: 2772.5,2148 2747.5,2148 2755,2163 2765,2163
  region net CN2_3: 2872.5,2148 2847.5,2148 2855,2163 2865,2163
  region net CN2_2: 2972.5,2148 2947.5,2148 2955,2163 2965,2163
  region net CN2_1: 3072.5,2148 3047.5,2148 3055,2163 3065,2163
  region net S8_1: 1990.96,3274.49 1966.06,3272.22 1990.8,3259.41 2003.76,3260.6
  region net S6_1: 1966.06,2864.88 1990.96,2862.63 2003.79,2876.54 1990.82,2877.71
  region net 2.6: 2825.34,3602.5 2825.34,3627.5 2840.34,3620 2840.34,3610
  region net R10_2: 2704.66,3607.5 2704.66,3632.5 2689.66,3625 2689.66,3615
  region net 0.6: 4547.5,2602.48 4572.5,2602.48 4565,2617.48 4555,2617.48
  region net 0.0: 5047.5,2602.48 5072.5,2602.48 5065,2617.48 5055,2617.48
  region net 0.1: 4947.5,2602.48 4972.5,2602.48 4965,2617.48 4955,2617.48
  region net 0.5: 4647.5,2602.48 4672.5,2602.48 4665,2617.48 4655,2617.48
  region net 0.7: 2267.5,3582.52 2242.5,3582.52 2250,3567.52 2260,3567.52
  region net VCC5: 4366.38,3121.22 4366.38,3259.02 4261.38,3225.55 4261.38,3155.55
  region net VCC5: 4413.62,3259.02 4413.62,3121.22 4518.62,3155.55 4518.62,3225.55
  region net U3_1: 5086.38,3120.98 5086.38,3258.78 4981.38,3226.61 4981.38,3156.61
  region net VCC5: 4600.16,3240.24 4600.16,3142.99 4495.16,3155.55 4495.16,3225.55
  region net U3_1: 4819.84,3142.99 4819.84,3240.24 4924.84,3226.61 4924.84,3156.61
  region net S9_1: 2092.16,3244.01 2094,3268.94 2079.93,3282.14 2078.96,3268.97
  region net S8_1: 2092.16,3152.63 2092.16,3173.94 2077.16,3187.2 2077.16,3173.06
  region net 7.3: 2217.83,3157.5 2217.83,3132.5 2232.83,3140 2232.83,3150
  region net S7_1: 2092.16,3037.5 2092.16,3062.5 2077.16,3055 2077.16,3045
  region net 7.2: 2217.83,3062.5 2217.83,3037.5 2232.83,3045 2232.83,3055
  region net 7.1: 2217.83,2972.5 2217.83,2947.5 2232.83,2955 2232.83,2965
  region net S5_1: 2094.02,2836.07 2092.16,2861 2078.98,2836.05 2079.96,2822.89
  region net 7.0: 2216.01,2893.94 2217.83,2869.01 2229.87,2892.8 2225.86,2902.93
  region net 6.6: 3087.11,2390.54 3087.11,2415.54 3098.04,2408.04 3098.04,2398.04
  region net CN2_1: 3072.5,2304.66 3047.5,2304.66 3055,2289.66 3065,2289.66
  region net CN2_2: 2972.5,2304.66 2947.5,2304.66 2955,2289.66 2965,2289.66
  region net CN2_3: 2872.5,2309.66 2847.5,2309.66 2855,2294.66 2865,2294.66
  region net 6.0: 2732.89,2420.54 2732.89,2395.54 2717.89,2403.04 2717.89,2413.04
  region net CN2_4: 2772.5,2309.66 2747.5,2309.66 2755,2294.66 2765,2294.66
  region net VCC5: 4080.34,3165 4080.34,3215 4096.51,3200 4096.51,3180
  region net VCC5: 4080.34,3165 4080.34,3215 4110.34,3200 4110.34,3180
  region net R2_2: 3959.66,3217.11 4004.25,3217.11 3991.96,3247.11 3971.96,3247.11
  region net R2_2: 3998.34,3277.45 3958.96,3277.45 3971.96,3247.45 3991.96,3247.45
  region net R10_2: 2641.5,3632.5 2641.5,3607.5 2656.5,3615 2656.5,3625
  region net U3_1: 5185.08,3000 5255.95,3000 5255.51,3079.37 5185.51,3079.37
  region net VCCBAT: 5444.92,2900 5374.05,2900 5374.49,2795 5444.49,2795
  region net VCC5: 4153.43,3165 4153.43,3215 4123.43,3200 4123.43,3180
  region net VCC5: 3811.25,2581.85 3758.75,2581.85 3765,2557.35 3805,2557.35
  region net 7.1: 2246.4,2950.25 2246.4,2969.75 2237.3,2965 2237.3,2955
  region net 7.2: 2246.4,3040.25 2246.4,3059.75 2237.3,3055 2237.3,3045
  region net 7.3: 2291.4,3135.25 2291.4,3154.75 2282.3,3150 2282.3,3140
  region net 1.5: 4601,2477.06 4619,2477.06 4615,2468.66 4605,2468.66
  region net 0.7: 2263.93,3475.92 2225.51,3497.96 2250,3507.74 2260,3502
  region net 3.5: 3548.26,2543.62 3507.17,2560.14 3515,2534.71 3525,2530.69
  region net VCCBAT: 4272.92,2052.52 4272.92,2170.63 4217.8,2161.58 4217.8,2061.58
  region net VCC5: 3589.84,2077.5 3589.84,2122.5 3610.84,2120 3610.84,2080
  region net VCC5: 2482.5,2080.16 2437.5,2080.16 2440,2059.16 2480,2059.16
  text "RST" at 1820,3625 h80
  text "2022.7.7" at 4760,3575 h80
  text "主板5.0" at 4755,3435 h80 r359
  text "亥伯森" at 3185,2995 h120
  text "青岛恒星科技学院" at 3825,2850 h80 r90
Bottom Layer:
  region net VCCBAT: 4045.43,2251.73 3974.57,2251.73 3960,2110 4060,2110
  region net VCCBAT: 3974.57,2153.31 4045.43,2153.31 4060,2295.04 3960,2295.04
  region net 3.6: 3712.5,3789.57 3687.5,3789.57 3695,3774.57 3705,3774.57
  region net VCC5: 3977.11,2944.66 3922.89,2944.66 3935,2899.66 3965,2899.66
  region net 7.5: 1807.5,2627.83 1782.5,2627.83 1790,2642.83 1800,2642.83
  region net SW1_1: 1897.5,2507.16 1922.5,2507.16 1915,2492.16 1905,2492.16
  region net 7.6: 1922.5,2632.83 1897.5,2632.83 1905,2647.83 1915,2647.83
  region net 7.4: 3539.66,3917.5 3539.66,3942.5 3524.66,3935 3524.66,3925
  region net R22_2: 3660.34,3912.5 3660.34,3937.5 3675.34,3930 3675.34,3920
  region net LED4_1: 4215.94,3520.51 4215.94,3459.49 4170.94,3475 4170.94,3505
  region net VCCSTEER: 4314.49,3675.94 4375.51,3675.94 4360,3630.94 4330,3630.94
  region net U4_1: 4996.38,2898.78 4996.38,2760.98 4891.38,2794.88 4891.38,2864.88
  region net U4_1: 5043.62,2760.98 5043.62,2898.78 5148.62,2865 5148.62,2795
  region net VCC5: 4301.38,2898.78 4301.38,2760.98 4196.38,2793.07 4196.38,2863.07
  region net VCC5: 4348.62,2760.98 4348.62,2898.78 4453.62,2863.07 4453.62,2793.07
  region net VCC5: 4514.32,2779.45 4514.32,2876.69 4409.32,2863.07 4409.32,2793.07
  region net U4_1: 4734,2876.69 4734,2779.45 4825,2794.44 4825,2864.44
  region net U4_1: 5180.08,2880 5180.08,2780 5075.08,2795 5075.08,2865
  region net VCCBAT: 5439.92,2880 5369.05,2880 5369.49,2985 5439.49,2985
  region net 2.3: 3097.5,3614.66 3072.5,3614.66 3080,3599.66 3090,3599.66
  region net R4_2: 3107.5,3735.34 3082.5,3735.34 3090,3750.34 3100,3750.34
  region net 2.5: 2997.5,3614.66 2972.5,3614.66 2980,3599.66 2990,3599.66
  region net R3_2: 3007.5,3735.34 2982.5,3735.34 2990,3750.34 3000,3750.34
  region net VCC5: 5193.54,2575 5193.54,2635 5165.54,2625 5165.54,2585
  region net VCC5: 3808.15,2578.75 3808.15,2631.25 3832.65,2625 3832.65,2585
  region net LED4_1: 4084.59,3475 4084.57,3505 4098.57,3505 4098.59,3475
  region net 7.0: 2267.97,2909.19 2254.19,2922.97 2263.98,2926.05 2271.05,2918.98
  region net 7.1: 2267.97,2959.19 2254.19,2972.97 2263.98,2976.05 2271.05,2968.98
  region net 7.2: 2267.97,3049.19 2254.19,3062.97 2263.98,3066.05 2271.05,3058.98
  region net 1.6: 4389.54,2506 4389.54,2524 4381.14,2520 4381.14,2510
  region net 1.3: 4997.06,2426 4997.06,2444 4988.66,2440 4988.66,2430
  region net 1.4: 4887.06,2451 4887.06,2469 4878.66,2465 4878.66,2455
  region net 1.5: 4602.06,2476 4602.06,2494 4593.66,2490 4593.66,2480
  region net 2.2: 3118.41,3494.43 3161.31,3483.41 3150,3507.65 3140,3510.22
  region net 2.6: 2957.15,3489.53 2912.85,3489.53 2930,3510.2 2940,3510.2
  region net 7.0: 3557.15,3350.47 3512.85,3350.47 3530,3329.8 3540,3329.8
  region net 7.2: 3457.15,3350.47 3412.85,3350.47 3430,3329.8 3440,3329.8
  region net 2.1: 3311.59,3800.57 3268.69,3811.59 3280,3787.35 3290,3784.78
  region net 2.0: 3211.59,3800.57 3168.69,3811.59 3180,3787.35 3190,3784.78
  region net R4_2: 3117.15,3805.47 3072.85,3805.47 3090,3784.8 3100,3784.8
  region net R3_2: 3017.15,3805.47 2972.85,3805.47 2990,3784.8 3000,3784.8
  region net VCCBAT: 4272.92,2052.52 4272.92,2170.63 4217.8,2161.58 4217.8,2061.58
  region net 3.7: 3826.57,3801.56 3773.43,3801.56 3795,3776.76 3805,3776.76

## Silkscreen, mask and mechanical layers (free items; w line width, h text height)
Top Overlay:
  lines w10: 4143.15,2450.79 4143.15,3750 cw(c4340,3750) 4340,3946.85 5284.88,3946.85 cw(c5284.88,3750) 5481.73,3750 5481.73,2450.79 cw(c5284.88,2450.79) 5284.88,2253.94 4340,2253.94 cw(c4340,2450.79) 4143.15,2450.79
  text "3" at 2230,3915 h80 r178
  text "2" at 2335,3915 h80 r180
  text "<—舵机" at 4250,3785 h80
  text "3.6" at 3665,3760 h80 r270
  text "3.7" at 3775,3760 h80 r269
  text "V" at 2865,3685 h80 r180
  text "白" at 3920,3685 h80 r180
  text "红" at 4023.43,3680.8 h80 r91
  text "黑" at 4135,3679.72 h80 r91
  text "7" at 2280,3555 h80 r180
  text "7.3" at 1630,3150 h80 r1
  text "7.3" at 1630,2921.67 h80 r1
  text "7.3" at 1630,2693.33 h80 r1
  text "7.3" at 1630,2465 h80 r1
  text "0" at 2740,1890 h80 r183
  text "2" at 2840.3,1890 h80 r180
  text "4" at 2942.1,1885.3 h80 r145
  text "6" at 3045,1885 h80 r184
Top Solder:
  text "RST" at 1820,3625 h80

## Text inside footprints (layer, text, board x,y; h text height)
SW1: Top Overlay "ON" at 1730.54,2220 h19.68 r90; Top Overlay "1" at 1910.86,2270 h19.68 r270; Top Overlay "2" at 1910.16,2370 h19.68 r270